# Altium PCB PCB3.PcbDoc
Units mil, origin at the board's own origin, x right, y up, seen from the top; angles counter-clockwise.
Board outline 6000 x 4000 mil, 2 copper layers (Top Layer, Bottom Layer); 71 components, 143 nets, 477 pads, 129 vias.
Unrouted connection lines stored in the file: 167.
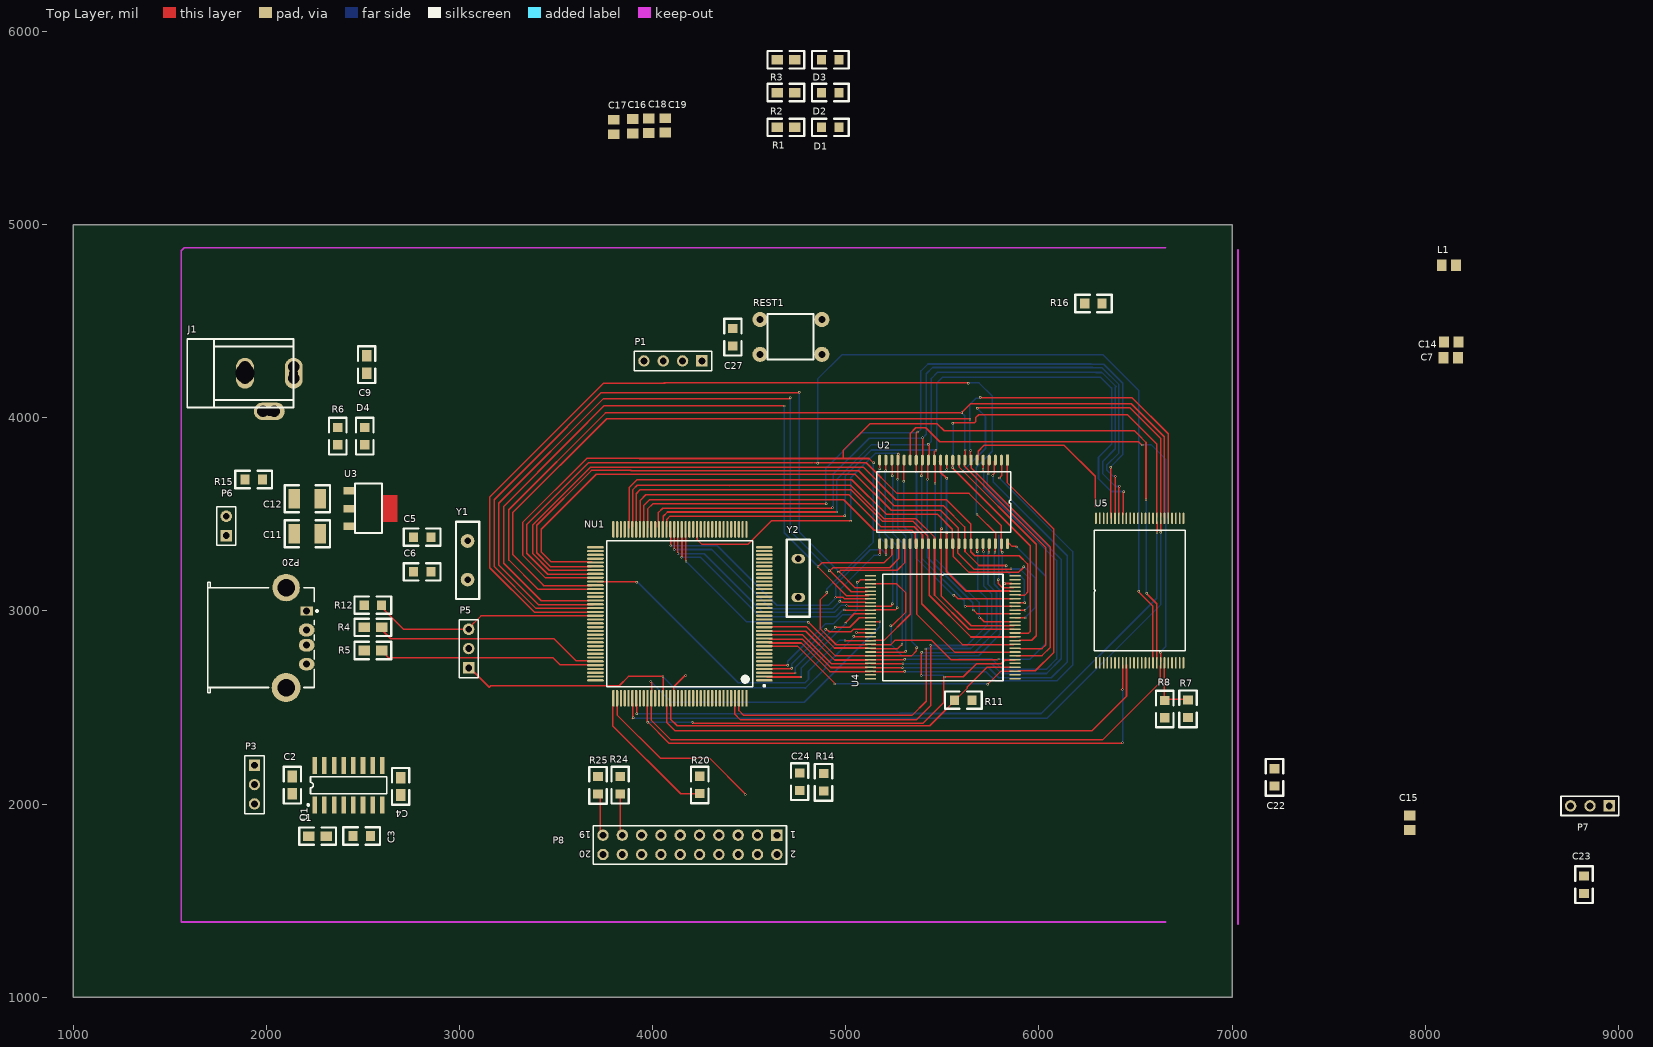
[diagram p0: Top Layer view]
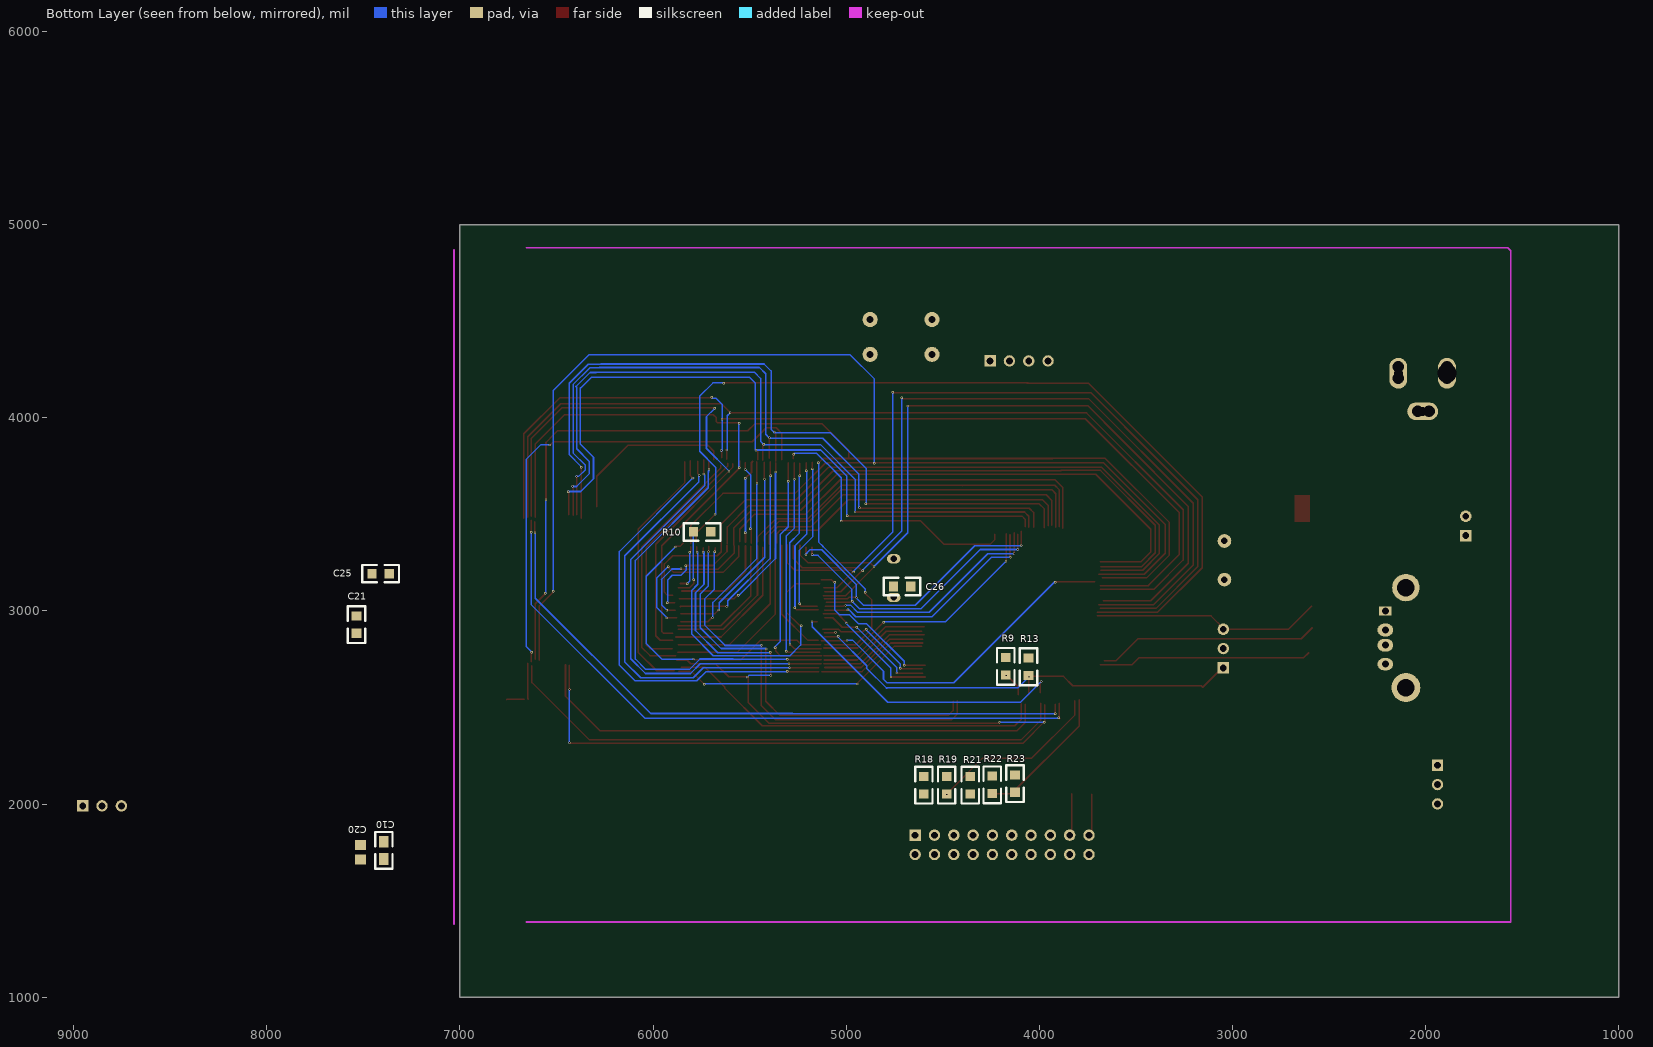
[diagram p1: Bottom Layer view, seen from below]

## Layer stack, top to bottom
Top Layer: signal copper 1.4
Dielectric: dielectric 12.6, FR-4, Dk 4.8
Bottom Layer: signal copper 1.4

## Board outline
1000,1000 7000,1000 7000,5000 1000,5000

## Design rules (kind name [scope] priority, off if disabled: settings)
Clearance [All] p1: gap=6
PolygonConnect [All] p1: connectstyle=Relief reliefconductorwidth=10 reliefentries=4 polygonreliefangle="90 Angle"
RoutingVias [All] p1: holewidth=28 width=50 viastyle="Through Hole" minholewidth=28 minwidth=50 maxholewidth=28 maxwidth=50
SilkscreenOverComponentPads [All] p1: minsilkscreentomaskgap=10
SolderMaskExpansion [All] p1: expansion=4
TestPointUsage [All] p1: valid=0 allowmultiple=FALSE
Testpoint [All] p1: side=15 testpointundercomponent=TRUE minsize=40 maxsize=100 preferedsize=60 minholesize=0 maxholesize=40 preferedholesize=32 testpointgrid=1 style=1023 order=0-112345678
Width [All] p1: maxlimit=50 minlimit=6 preferedwidth=10 minimp=50.000000 maximp=50.000000 favimp=50.000000
23 further rules are at their usual default settings.

## Classes and differential pairs
net class Y2_Nets: OSCIN OSCOUT
net class C26_Nets: GND OSCOUT
net class U1_Nets: GND NetC1_1 NetC1_2 NetC2_2 NetC3_1 NetC3_2 NetC4_1 NetU1_7 NetU1_8 NetU1_9 NetU1_10 PA9 PA10 R1IN T1OUT VDD5
net class C4_Nets: GND NetC4_1
net class C2_Nets: NetC2_2 VDD5
component class EXTERN: 1 C1 C2 C3 C4 D1 D2 D3 P1 P3 P20 R1 R2 R3 R4 R5 U1
component class GPIO_OUT: C5 C6 Y1
component class POWER: C7 C9 C10 C11 C12 C14 C15 C16 C17 C18 C19 C20 D4 J1 L1 NU1 R6 U3
component class STORAGE: C21 C22 C23 C24 P5 P6 R7 R8 R9 R10 R11 R12 R13 R14 R15 U2 U4 U5
component class "XLAT AND JTAG": C25 C26 C27 P7 P8 R16 R18 R19 R20 R21 R22 R23 R24 R25 REST1 Y2
net class C1_Nets: NetC1_1 NetC1_2
net class C3_Nets: NetC3_1 NetC3_2
net class C5_Nets: GND PB14
net class C6_Nets: GND PB15
net class C7_Nets: GND VDD33
net class C9_Nets: GND VDD5
net class C10_Nets: GND VDD33
net class C11_Nets: GND VDD5
net class C12_Nets: GND VDD33
net class C14_Nets: GND VDD33
net class C15_Nets: GND VDD33
net class C16_Nets: GND VDD33
net class C17_Nets: GND VDD33
net class C18_Nets: GND VDD33
net class C19_Nets: GND VDD33
net class C20_Nets: GND VDD33
net class C21_Nets: GND VDD33
net class C22_Nets: GND VDD33
net class C23_Nets: GND VDD33
net class C24_Nets: GND NetC24_1
net class C25_Nets: GND OSCIN
net class C27_Nets: GND NRST
net class D1_Nets: NetD1_2 VDD33
net class D2_Nets: NetD2_2 VDD33
net class D3_Nets: NetD3_2 VDD33
net class D4_Nets: GND NetD4_1
net class J1_Nets: GND VDD5
net class L1_Nets: NetL1_1 VDD33
net class NU1_Nets: A0 A1 A2 A3 A4 A5 A6 A7 A8 A9 A10 A11 A12 A13 A14 A15 A16 A17 A18 A19 A20 A21 A22 A23 BOOT0 D0 D1 D2 D3 D4 D5 D6 D7 D8 D9 D10 D11 D12 D13 D14 D15 GND LED0 LED1 LED2 NetL1_1 NetNU1_6 NetNU1_106 NRST OSCIN OSCOUT PA0 PA1 PA2 PA3 PA4 PA5 PA6 PA7 PA8 PA9 PA10 PA11 PA12 PA13 PA14 PA15 PB0 PB1 PB2 PB3 PB4 PB5 PB6 PB7 PB8 PB9 PB10 PB11 PB12 PB13 PB14 PB15 PC0 PC1 PC2 PC3 PC4 PC5 PC6 PC7 PC8 PC9 PC10 PC11 PC12 PC13 PC14 PC15 PD2 PD3 PD4 PD5 PD6 PD7 PE0 PE1 PF6 PF10 PF11 PG6 PG7 PG8 PG9 PG10 PG11 PG12 PG13 PG14 PG15 VDD33
net class P1_Nets: PA5 PA6 PA7 PA8
net class P3_Nets: GND R1IN T1OUT
net class P5_Nets: NetP5_2 PD6 PG6
net class P6_Nets: GND NetP6_2
net class P7_Nets: BOOT0 GND VDD33
net class P8_Nets: GND NetP8_11 NetP8_17 NetP8_19 NRST PA13 PA14 PA15 PB3 PB4 VDD33
net class P20_Nets: GND NetP20_2 NetP20_3 NetP20_5 NetP20_6 "USB 5V"
net class R1_Nets: LED0 NetD1_2
net class R2_Nets: LED1 NetD2_2
net class R3_Nets: LED2 NetD3_2
net class R4_Nets: NetP20_2 PA11
net class R5_Nets: NetP20_3 PA12
net class R6_Nets: NetD4_1 VDD33
net class R7_Nets: GND NetR7_1
net class R8_Nets: NetR7_1 VDD33
net class R9_Nets: PG10 VDD33
net class R10_Nets: NetR10_1 VDD33
net class R11_Nets: PG9 VDD33
net class R12_Nets: PG6 VDD33
net class R13_Nets: PD6 VDD33
net class R14_Nets: NetC24_1 VDD33
net class R15_Nets: NetP6_2 VDD33
net class R16_Nets: NRST VDD33
net class R18_Nets: PB4 VDD33
net class R20_Nets: PA14 VDD33
net class R21_Nets: PA13 VDD33
net class R22_Nets: GND PA14
net class R23_Nets: GND NetP8_11
net class R24_Nets: GND NetP8_17
net class R25_Nets: GND NetP8_19
net class REST1_Nets: GND NRST
net class U2_Nets: A0 A1 A2 A3 A4 A5 A6 A7 A8 A9 A10 A11 A12 A13 A14 A15 A16 A17 A18 D0 D1 D2 D3 D4 D5 D6 D7 D8 D9 D10 D11 D12 D13 D14 D15 GND PD4 PD5 PE0 PE1 PG10 VDD33
net class U3_Nets: GND VDD5 VDD33
net class A[0..23]: A0 A1 A2 A3 A4 A5 A6 A7 A8 A9 A10 A11 A12 A13 A14 A15 A16 A17 A18 A19 A20 A21 A22 A23 NetU4_1 NetU4_27 NetU4_28 NetU4_30 NetU4_55 NetU4_56
net class U5_Nets: A16 A17 D0 D1 D2 D3 D4 D5 D6 D7 GND NetP5_2 NetR7_1 PD4 PD5 PD7 VDD33
net class Y1_Nets: PB14 PB15
net class D[0..15]: AD0 AD1 AD2 AD3 AD4 AD5 AD6 AD7 AD8 AD9 AD10 AD11 AD12 AD13 AD14 AD15 AD16 AD17 AD18 AD19 AD20 AD21 AD22 AD23 D0 D1 D2 D3 D4 D5 D6 D7 D8 D9 D10 D11 D12 D13 D14 D15 DATA0 DATA1 DATA2 DATA3 DATA4 DATA5 DATA6 DATA7 DATA8 DATA9 DATA10 DATA11 DATA12 DATA13 DATA14 DATA15 NetU4_1 NetU4_27 NetU4_28 NetU4_30 NetU4_55 NetU4_56
net class U4_Nets: A0 A1 A2 A3 A4 A5 A6 A7 A8 A9 A10 A11 A12 A13 A14 A15 A16 A17 A18 A19 A20 A21 A22 D0 D1 D2 D3 D4 D5 D6 D7 D8 D9 D10 D11 D12 D13 D14 D15 GND NetC24_1 NetP6_2 NetR10_1 NetU4_1 NetU4_27 NetU4_28 NetU4_30 NetU4_55 NetU4_56 PD4 PD5 PD6 PG9 VDD33
net class R19_Nets: PA15 VDD33

## Components (designator, comment, footprint, x,y, rotation, side; value= is the part's Value field where it differs from the comment)
C1 "0.1uF" 0805#1 2221,1834 r0 top
C2 "0.1uF" 0805#1 2135,2143 r270 top
C3 "0.1uF" 0805#2 2539,1835 r180 top
C4 "0.1uF" 0805#1 2696,2047 r90 top
C5 "Cap" 0805#2 2762,3382 r0 top
C6 "Cap" 0805#2 2762,3202 r0 top
C7 "Cap" 6-0805 8132,4310 r180 top
C9 "102" 0805#1 2520,4320 r270 top
C10 "102" 0805#1 7393,1806 r270 bottom
C11 "2.2uf" 1210 2280,3400 r180 top
C12 "2.2uf" 1210 2280,3580 r180 top
C14 "Cap" 6-0805 8134,4392 r180 top
C15 "Cap" 6-0805 7920,1904 r90 top
C16 "Cap" 6-0805 3898,5509 r270 top
C17 "Cap" 6-0805 3798,5505 r270 top
C18 "Cap" 6-0805 3981,5511 r270 top
C19 "Cap" 6-0805 4065,5513 r270 top
C20 "Cap" 6-0805 7514,1751 r90 bottom
C21 "Cap" 0805#2 7535,2974 r270 bottom
C22 "Cap" 0805#2 7219,2183 r270 top
C23 "Cap" 0805#2 8821,1628 r270 top
C24 "Cap" 0805#2 4761,2161 r270 top
C25 "Cap" 0805#2 7455,3193 r180 bottom
C26 "Cap" 0805#2 4666,3126 r0 bottom
C27 "Cap" 0805#2 4415,4462 r270 top
D1 "LED0" 0805#2 4965,5503 r180 top
D2 "LED0" 0805#2 4965,5683 r180 top
D3 "LED0" 0805#2 4965,5853 r180 top
D4 "LED3" 0805#2 2510,3950 r270 top
J1 "PWR2.5" Power_In 1872,4320 r0 top
L1 "Inductor" 6-0805 8122,4790 r0 top
NU1 "STM32F103ZET6" LQFN144 4141,2985 r180 top
P1 "Header 4" HDR1X4 4255,4294 r180 top
P3 "Header 3" HDR1X3 1939,2201 r270 top
P5 "Header 3" HDR1X3 3048,2705 r90 top
P6 "Header 2" HDR1X2 1793,3390 r90 top
P7 "Header 3" HDR1X3 8952,1991 r180 top
P8 "Header 10X2" HDR2X10 4643,1839 r180 top
P20 "P10" 787616 1698,2862 r180 top
R1 "Res2" 0805#1 4645,5503 r0 top
R2 "Res2" 0805#1 4645,5683 r0 top
R3 "Res2" 0805#1 4645,5853 r0 top
R4 "Res2" 0805#1 2507,2915 r0 top
R5 "Res2" 0805#1 2507,2795 r0 top
R6 "Res2" 0805#2 2370,3950 r270 top
R7 "Res2" 0805#2 6771,2538 r270 top
R8 "Res2" 0805#2 6651,2447 r90 top
R9 "Res2" 0805#2 4174,2668 r90 bottom
R10 "Res2" 0805#2 5791,3409 r180 bottom
R11 "Res2" 0805#2 5563,2538 r0 top
R12 "Res2" 0805#2 2597,3030 r180 top
R13 "Res2" 0805#2 4056,2756 r270 bottom
R14 "Res2" 0805#2 4885,2068 r90 top
R15 "Res2" 0805#2 1980,3680 r180 top
R16 "Res2" 0805#2 6327,4591 r180 top
R18 "Res2" 0805#2 4598,2053 r90 bottom
R19 "Res2" 0805#2 4480,2053 r90 bottom
R20 "Res2" 0805#2 4244,2054 r90 top
R21 "Res2" 0805#2 4358,2053 r90 bottom
R22 "Res2" 0805#2 4244,2055 r90 bottom
R23 "Res2" 0805#2 4126,2061 r90 bottom
R24 "Res2" 0805#2 3832,2053 r90 top
R25 "Res2" 0805#2 3717,2052 r90 top
REST1 "SW_PB" SWPB 4876,4508 r0 top
U1 "MAX232-2" SOIC16 2426,2098 r0 top
U2 "IS61LV51216-10T" TSOP44 5837,3781 r270 top
U3 "LM1117-3.3" SOT-223 2600,3660 r270 top
U4 "M29W128GL" TSOP56 5128,3181 r0 top
U5 "NAND512W3A2CN6E" TSOP48 6295,2731 r90 top
Y1 "XTAL" XTAL-1#1 3042,3162 r90 top
Y2 "XTAL" XTAL-1#2 4754,3070 r90 top

## Footprints (in the part's own frame and the unit in brackets; to place one, negate y for a bottom-side part, rotate by r counter-clockwise, add the part's x,y. Pads: shape width x height; smd on the part's side, far side on the other; paste and mask are expansions set on the pad)
6-0805 [mm] "Chip Resistor; Body 2.0 x 1.3 mm (LxW typ)"
  rect 1.3x1.5 smd: 1(-0.95,0) 2(0.95,0)
0805#1 [mil]
  rect 60x50 smd: 1(0,0) 2(90,0)
  silkscreen extent -50,-45 140,45
0805#2 [mil]
  rect 47.37x50 smd: 1(0,0) 2(90,0)
  silkscreen extent -50,-45 140,45
1210 [mil]
  rect 60x100 smd: 1(0,0) 2(135,0)
  silkscreen extent -50,-70 185,70
787616 [mm] "Connector; USB1.1, Type A, Thru-Hole; 4 Position; Right Angle"
  rect 1.606x1.2 hole 0.92: 1(-12.99,-3.5)
  oval 2.057x1.676 hole 0.92: 2(-12.99,-1) 3(-12.99,1)
  oval 2.057x1.6 hole 0.92: 4(-12.99,3.5)
  round 3.8 hole 2.3: 5(-10.28,6.57)
  round 3.6 hole 2.3: 6(-10.28,-6.57)
  silkscreen extent -14.47,-7.25 0,7.25
HDR1X2 [mm] "Connector; Header; 2 Position"
  rect 1.5x1.5 hole 0.9: 1(0,0)
  round 1.5 hole 0.9: 2(2.54,0)
  silkscreen extent -1.27,-1.27 3.81,1.27
HDR1X3 [mm] "Connector; Header; 3 Position"
  rect 1.5x1.5 hole 0.9: 1(0,0)
  round 1.5 hole 0.9: 2(2.54,0) 3(5.08,0)
  silkscreen extent -1.27,-1.27 6.35,1.27
HDR1X4 [mm] "Connector; Header; 4 Position"
  rect 1.5x1.5 hole 0.9: 1(0,0)
  round 1.5 hole 0.9: 2(2.54,0) 3(5.08,0) 4(7.62,0)
  silkscreen extent -1.27,-1.27 8.89,1.27
HDR2X10 [mm] "Connector; Header; 10x2 Position"
  rect 1.5x1.5 hole 0.9: 1(0,0)
  round 1.5 hole 0.9: 2(0,2.54) 3(2.54,0) 4(2.54,2.54) 5(5.08,0) 6(5.08,2.54) 7(7.62,0) 8(7.62,2.54) 9(10.16,0) 10(10.16,2.54) 11(12.7,0) 12(12.7,2.54) 13(15.24,0) 14(15.24,2.54) 15(17.78,0) 16(17.78,2.54) 17(20.32,0) 18(20.32,2.54) 19(22.86,0) 20(22.86,2.54)
  silkscreen extent -1.27,-1.27 24.13,3.81
LQFN144 [mm] "TSQFP, 144-Leads, Body 23.8x23.8mm (max), Pitch 0.50mm, IPC Medium Density"
  oval 2.2x0.3 smd: 1(-11.1,8.75) 2(-11.1,8.25) 3(-11.1,7.75) 4(-11.1,7.25) 5(-11.1,6.75) 6(-11.1,6.25) 7(-11.1,5.75) 8(-11.1,5.25) 9(-11.1,4.75) 10(-11.1,4.25) 11(-11.1,3.75) 12(-11.1,3.25) 13(-11.1,2.75) 14(-11.1,2.25) 15(-11.1,1.75) 16(-11.1,1.25) 17(-11.1,0.75) 18(-11.1,0.25) 19(-11.1,-0.25) 20(-11.1,-0.75) 21(-11.1,-1.25) 22(-11.1,-1.75) 23(-11.1,-2.25) 24(-11.1,-2.75) 25(-11.1,-3.25) 26(-11.1,-3.75) 27(-11.1,-4.25) 28(-11.1,-4.75) 29(-11.1,-5.25) 30(-11.1,-5.75) 31(-11.1,-6.25) 32(-11.1,-6.75) 33(-11.1,-7.25) 34(-11.1,-7.75) 35(-11.1,-8.25) 36(-11.1,-8.75) 73(11.1,-8.75) 74(11.1,-8.25) 75(11.1,-7.75) 76(11.1,-7.25) 77(11.1,-6.75) 78(11.1,-6.25) 79(11.1,-5.75) 80(11.1,-5.25) 81(11.1,-4.75) 82(11.1,-4.25) 83(11.1,-3.75) 84(11.1,-3.25) 85(11.1,-2.75) 86(11.1,-2.25) 87(11.1,-1.75) 88(11.1,-1.25) 89(11.1,-0.75) 90(11.1,-0.25) 91(11.1,0.25) 92(11.1,0.75) 93(11.1,1.25) 94(11.1,1.75) 95(11.1,2.25) 96(11.1,2.75) 97(11.1,3.25) 98(11.1,3.75) 99(11.1,4.25) 100(11.1,4.75) 101(11.1,5.25) 102(11.1,5.75) 103(11.1,6.25) 104(11.1,6.75) 105(11.1,7.25) 106(11.1,7.75) 107(11.1,8.25) 108(11.1,8.75)
  oval 0.3x2.2 smd: 37(-8.75,-11.1) 38(-8.25,-11.1) 39(-7.75,-11.1) 40(-7.25,-11.1) 41(-6.75,-11.1) 42(-6.25,-11.1) 43(-5.75,-11.1) 44(-5.25,-11.1) 45(-4.75,-11.1) 46(-4.25,-11.1) 47(-3.75,-11.1) 48(-3.25,-11.1) 49(-2.75,-11.1) 50(-2.25,-11.1) 51(-1.75,-11.1) 52(-1.25,-11.1) 53(-0.75,-11.1) 54(-0.25,-11.1) 55(0.25,-11.1) 56(0.75,-11.1) 57(1.25,-11.1) 58(1.75,-11.1) 59(2.25,-11.1) 60(2.75,-11.1) 61(3.25,-11.1) 62(3.75,-11.1) 63(4.25,-11.1) 64(4.75,-11.1) 65(5.25,-11.1) 66(5.75,-11.1) 67(6.25,-11.1) 68(6.75,-11.1) 69(7.25,-11.1) 70(7.75,-11.1) 71(8.25,-11.1) 72(8.75,-11.1) 109(8.75,11.1) 110(8.25,11.1) 111(7.75,11.1) 112(7.25,11.1) 113(6.75,11.1) 114(6.25,11.1) 115(5.75,11.1) 116(5.25,11.1) 117(4.75,11.1) 118(4.25,11.1) 119(3.75,11.1) 120(3.25,11.1) 121(2.75,11.1) 122(2.25,11.1) 123(1.75,11.1) 124(1.25,11.1) 125(0.75,11.1) 126(0.25,11.1) 127(-0.25,11.1) 128(-0.75,11.1) 129(-1.25,11.1) 130(-1.75,11.1) 131(-2.25,11.1) 132(-2.75,11.1) 133(-3.25,11.1) 134(-3.75,11.1) 135(-4.25,11.1) 136(-4.75,11.1) 137(-5.25,11.1) 138(-5.75,11.1) 139(-6.25,11.1) 140(-6.75,11.1) 141(-7.25,11.1) 142(-7.75,11.1) 143(-8.25,11.1) 144(-8.75,11.1)
  silkscreen extent -11.23,-9.6 9.6,9.6, body extent -10,-10 10,10, height 1.6
Power_In [mil]
  rect 60x60 hole 60: 1(270,-116) 2(170,-287) 3(18,-57)
  oval 92x160 hole 47: 1(270,-90)
  rect 50x60 hole 60: 1(270,-57) 3(18,-116)
  rect 60x50 hole 60: 2(111,-287)
  oval 160x92 hole 47: 2(144,-287)
  oval 92x160 hole 100: 3(18,-90)
  silkscreen extent -281,-267 270,87
SOIC16 [mm]
  rect 0.6x2.2 smd: 1(-4.445,-2.6) 2(-3.175,-2.6) 3(-1.905,-2.6) 4(-0.635,-2.6) 5(0.635,-2.6) 6(1.905,-2.6) 7(3.175,-2.6) 8(4.445,-2.6) 9(4.445,2.6) 10(3.175,2.6) 11(1.905,2.6) 12(0.635,2.6) 13(-0.635,2.6) 14(-1.905,2.6) 15(-3.175,2.6) 16(-4.445,2.6)
  silkscreen extent -5.42,-2.72 5,1.1
SOT-223 [mm]
  rect 1x1.5 smd: 1(0.95,-4.31) 2(3.35,-4.31) 3(5.65,-4.31)
  Top Layer region: 1.524,0 5.08,0 5.08,2.032 1.524,2.032
  silkscreen extent 0,-3.56 6.5,0
SWPB [mm]
  round 2 hole 0.9: 1(-8.128,0) 2(-8.128,-4.572) 3(0,-4.572) 4(0,0)
  silkscreen extent -7.13,-5.25 -1.13,0.75
TSOP44 [mm]
  rect 1.4x0.4 smd: 1(0,0)
  oval 1.4x0.4 smd: 2(0,-0.8) 3(0,-1.6) 4(0,-2.4) 5(0,-3.2) 6(0,-4) 7(0,-4.8) 8(0,-5.6) 9(0,-6.4) 10(0,-7.2) 11(0,-8) 12(0,-8.8) 13(0,-9.6) 14(0,-10.4) 15(0,-11.2) 16(0,-12) 17(0,-12.8) 18(0,-13.6) 19(0,-14.4) 20(0,-15.2) 21(0,-16) 22(0,-16.8) 23(11,-16.8) 24(11,-16) 25(11,-15.2) 26(11,-14.4) 27(11,-13.6) 28(11,-12.8) 29(11,-12) 30(11,-11.2) 31(11,-10.4) 32(11,-9.6) 33(11,-8.8) 34(11,-8) 35(11,-7.2) 36(11,-6.4) 37(11,-5.6) 38(11,-4.8) 39(11,-4) 40(11,-3.2) 41(11,-2.4) 42(11,-1.6) 43(11,-0.8) 44(11,0)
  silkscreen extent 1.53,-17.2 9.47,0.4
TSOP48 [mm]
  rect 1.5x0.22 smd: 1(0,0)
  oval 1.5x0.22 smd: 2(0,-0.5) 3(0,-1) 4(0,-1.5) 5(0,-2) 6(0,-2.5) 7(0,-3) 8(0,-3.5) 9(0,-4) 10(0,-4.5) 11(0,-5) 12(0,-5.5) 13(0,-6) 14(0,-6.5) 15(0,-7) 16(0,-7.5) 17(0,-8) 18(0,-8.5) 19(0,-9) 20(0,-9.5) 21(0,-10) 22(0,-10.5) 23(0,-11) 24(0,-11.5) 25(19,-11.5) 26(19,-11) 27(19,-10.5) 28(19,-10) 29(19,-9.5) 30(19,-9) 31(19,-8.5) 32(19,-8) 33(19,-7.5) 34(19,-7) 35(19,-6.5) 36(19,-6) 37(19,-5.5) 38(19,-5) 39(19,-4.5) 40(19,-4) 41(19,-3.5) 42(19,-3) 43(19,-2.5) 44(19,-2) 45(19,-1.5) 46(19,-1) 47(19,-0.5) 48(19,0)
  silkscreen extent 1.58,-11.75 17.42,0.25
TSOP56 [mm]
  rect 1.5x0.2 smd: 1(0,0)
  oval 1.5x0.2 smd: 2(0,-0.5) 3(0,-1) 4(0,-1.5) 5(0,-2) 6(0,-2.5) 7(0,-3) 8(0,-3.5) 9(0,-4) 10(0,-4.5) 11(0,-5) 12(0,-5.5) 13(0,-6) 14(0,-6.5) 15(0,-7) 16(0,-7.5) 17(0,-8) 18(0,-8.5) 19(0,-9) 20(0,-9.5) 21(0,-10) 22(0,-10.5) 23(0,-11) 24(0,-11.5) 25(0,-12) 26(0,-12.5) 27(0,-13) 28(0,-13.5) 29(19,-13.5) 30(19,-13) 31(19,-12.5) 32(19,-12) 33(19,-11.5) 34(19,-11) 35(19,-10.5) 36(19,-10) 37(19,-9.5) 38(19,-9) 39(19,-8.5) 40(19,-8) 41(19,-7.5) 42(19,-7) 43(19,-6.5) 44(19,-6) 45(19,-5.5) 46(19,-5) 47(19,-4.5) 48(19,-4) 49(19,-3.5) 50(19,-3) 51(19,-2.5) 52(19,-2) 53(19,-1.5) 54(19,-1) 55(19,-0.5) 56(19,0)
  silkscreen extent 1.58,-13.75 17.42,0.25
XTAL-1#1 [mm]
  round 1.8 hole 0.85: 1(0,0) 2(5.08,0)
  silkscreen extent -2.54,-1.52 7.62,1.52
XTAL-1#2 [mm]
  oval 1.203x1.8 hole 0.85: 1(0,0) 2(5.08,0)
  silkscreen extent -2.54,-1.52 7.62,1.52

## Part data
C1 C2 C3 C4 C9 C10 C11 C12: library part CAP, "Capacitor"
C5 C6 C7 C14 C15 C16 C17 C18 C19 C20 C21 C22 C23 C24 C25 C26 C27: "Capacitor"
D1 D2 D3: "Typical INFRARED GaAs LED"
D4: "Typical BLUE SiC LED"
J1: "Low Voltage Power Supply Connector"
P1: "Header, 4-Pin"
P3 P5 P7: "Header, 3-Pin"
P6: "Header, 2-Pin"
P8: "Header, 10-Pin, Dual row"
P20: library part COMPONENT_1
R1 R2 R3 R4 R5 R6 R7 R8 R9 R10 R11 R12 R13 R14 R15 R16 R18 R19 R20 R21 R22 R23 R24 R25: "Resistor"
U1: library part MAX3232-2
Y1 Y2: "Crystal Oscillator"

## Via types
v1: diameter 12, hole 7, Top Layer to Bottom Layer, 129 vias

## Nets (pads, with @x,y where several pads share a name; then routed paths per layer and width w, separated by ;. In a path a pad name is that pad's centre, name@x,y a point inside that pad or via, vN(x,y) a via of type N, cw(c..) or ccw(c..) an arc to the next point about the centre after c; other vN are vias at no path point)
A0: NU1.10 U2.1 U4.31 | length 2678.3
  Top Layer w8: NU1.10@4608,2818 4750,2818 v1@4946,2622 ; v1@5736,2622 5801,2687 U4.31@5866,2687 ; U2.1@5835,3771 5835,3665 6076,3424 6076,2785 5981,2690 U4.31@5890,2690
  Bottom Layer w8: v1(4942,2622) v1@5733,2622
  other v1: 5735,2621
A1: NU1.11 U2.2 U4.26 | length 2900.8
  Top Layer w8: NU1.11@4603,2834 4770,2834 4918,2686 U4.26@5126,2686 ; U4.26@5141,2686 5304,2686 v1@5306,2688 ; v1(5794,3688) 5808,3702 U2.2@5808,3776
  Bottom Layer w8: v1@5305,2685 5726,2685 5773,2638 6093,2638 6174,2719 6174,3308 v1@5792,3690 ; v1@5789,3688 v1@5793,3684
  other v1: 5305.22,2687.22
A2: NU1.12 U2.3 U4.25 | length 2826.8
  Top Layer w8: NU1.12@4605,2854 4775,2854 4922,2707 U4.25@5110,2707 ; U4.25@5143,2706 v1@5295,2706 ; v1@5761,3703 5769,3711 U2.3@5769,3775
  Bottom Layer w8: v1@5295,2706 5740,2706 5792,2654 6064,2654 6146,2736 6146,3285 5763.31,3667.69 v1@5763.31,3700.31 ; v1@5761,3698 v1@5764,3701
  other v1: 5293,2705 5761,3701
A3: NU1.13 U2.4 U4.24 | length 2808.2
  Top Layer w8: NU1.13@4597,2877 4776,2877 4926,2727 U4.24@5117,2727 ; U4.24@5130,2726 v1@5297,2726 ; v1@5738,3711 U2.4@5738,3783
  Bottom Layer w8: v1@5297,2726 5756,2726 5806,2676 6039,2676 6115,2752 6115,3266 5733,3648 v1@5733,3705 ; 5734,3702 v1@5738,3706
  other v1: 5296,2727 5737,3709
A4: NU1.14 U2.5 U4.23 | length 2765.4
  Top Layer w8: NU1.14@4610,2895 4793,2895 4942,2746 U4.23@5114,2746 ; U4.23 v1@5300.93,2747.93 ; 5711,3722 U2.5@5711,3772
  Bottom Layer w8: v1(5305,2750) 5583,2750 ; 5584,2751 5757,2751 5811,2697 6037,2697 6091,2751 6091,3261 5714,3638 5714,3723 5712,3725 ; 5712,3717 v1@5712,3733
  other v1: 5710,3734
A5: NU1.15 U2.18 U4.22 | length 1837.6
  Top Layer w8: NU1.15@4597,2919 4795,2919 4947,2767 U4.22@5117,2767 ; U4.22@5126,2768 5340,2768 5341,2769 ; v1@5299,3673 U2.18@5299,3767 ; 5340,2767 5365,2792 v1@5365,2812
  Bottom Layer w8: v1(5300,3671) 5300,3436 5342,3394 ; 5342,3393 5342,2840 v1@5372,2810
  other v1: 5368,2810
A6: NU1.50 U2.19 U4.21 | length 2610.3
  Top Layer w8: NU1.50@4230,3398 4230,3369 4255,3344 4493,3344 4616,3467 v1@5027,3467 ; U4.21@5138,2787 5305,2787 v1(5310,2792) ; v1@5269,3681 U2.19@5269,3768 ; v1@5271,3816 5273,3814 U2.19@5273,3788
  Bottom Layer w8: v1(5025,3465) 5025,3689 5101,3765 ; 5101,3763 5153,3815 5268,3815 v1@5271,3812 ; v1(5268,3682) 5268,3429 5311,3386 ; v1(5310,2792) 5310,3387
  other v1: 5271,3811
A7: NU1.53 U2.20 U4.20 | length 2399
  Top Layer w8: v1@4172,3258 NU1.53@4172,3400 ; v1@4806,2943 4941,2808 U4.20@5117,2808 ; U4.20@5130,2805 5269,2805 v1(5291,2827) ; v1(5241,3700) U2.20@5241,3764
  Bottom Layer w8: v1(4173,3257) 4487,2943 v1@4808,2943 ; v1@5244,3696 5244,3401 5292,3353 v1@5292,2825
  other v1: 4806,2941
A8: NU1.54 U2.21 U4.10 | length 2124.1
  Top Layer w8: v1@4149,3277 4152,3280 NU1.54@4152,3395 ; v1@4995,3004 5111,3004 U4.10@5112,3003 ; U4.10@5145,3005 5257,3005 v1@5267,3015 ; v1@5206,3722 U2.21@5206,3766
  Bottom Layer w8: v1(4149.96,3277.96) 4248.04,3277.96 4556,2970 4950,2970 4991,3011 ; v1@5203,3724 5203,3399 5265,3337 v1@5265,3018
  other v1: 4992,3005 5266,3017 5206,3726
A9: NU1.55 U2.22 U4.9 | length 2072.9
  Top Layer w8: NU1.55@4131,3405 v1(4131,3297) v1@4132,3296 ; v1@5009,3028 5014,3023 U4.9@5108,3023 ; U4.9@5150,3023 5233,3023 v1@5244,3034 ; v1@5175,3737 U2.22@5175,3769
  Bottom Layer w8: v1@4132,3296 4267,3296 4570,2993 4941,2993 4978,3030 v1@4999,3030 ; v1@5172,3733 5172,3385 5242,3315 v1@5242,3038
  other v1: 5004,3028 5241,3037 5176,3735
A10: NU1.56 U2.23 U4.8 | length 1582.4
  Top Layer w8: v1@4112,3319 NU1.56@4112,3397 ; 4975,3049 4980,3044 U4.8@5103,3044 ; v1@5177,3297 U2.23@5177,3330
  Bottom Layer w8: v1@4109,3318 4306,3318 4613,3011 4931,3011 4965,3045 v1@4965,3051 ; v1@4972,3054 4972,3113 5146,3287 5179,3287
  other v1: 4969,3050 5175,3292 4112,3318
A11: NU1.57 U2.24 U4.7 | length 1694.7
  Top Layer w8: NU1.57@4093,3411 4093,3340 v1(4094,3339) ; v1@4946,3071 4985,3071 4992,3064 U4.7@5113,3064 ; v1@5207,3288 5208,3289 U2.24@5208,3330
  Bottom Layer w8: v1@4091,3337 4334,3337 4642,3029 4910,3029 v1@4947,3066 ; v1@4949,3074 4949,3138 5127,3316 5187,3316 v1@5212,3291
  other v1: 4947,3069 5208,3291
A12: NU1.87 U2.25 U4.6 | length 4168.2
  Top Layer w8: 3581,3894 3749,4062 4680,4062 v1(4681,4061) ; 3582,3894 3229,3541 3229,3247 3424,3052 NU1.87@3670,3052 ; v1(4856,3228) 4878,3250 5199,3250 5239,3290 U2.25@5239,3341 ; v1@4858,3225 5004,3079 U4.6@5119,3079
  Bottom Layer w8: v1(4681,4061) 4681,3405 v1@4855,3231
A13: NU1.88 U2.26 U4.5 | length 4295.2
  Top Layer w8: NU1.88@3692,3033 3408,3033 3204,3237 3204,3557 3746,4099 v1@4713,4099 ; v1@4916,3206 4934,3224 5227,3224 5274,3271 U2.26@5274,3340 ; v1@4920,3207 5028,3099 U4.5@5112,3099
  Bottom Layer w8: v1(4713,4103) 4713,3413 v1@4917,3209
  other v1: 4915,3208
A14: NU1.89 U2.27 U4.4 | length 4399.5
  Top Layer w8: 3557,3953 3733,4129 v1@4761,4129 ; 3558,3953 3180,3575 3180,3230 3397,3013 NU1.89@3684,3013 ; v1@4965,3201 4974,3210 5266,3210 5306,3250 U2.27@5306,3343 ; 4967,3201 5048,3120 U4.4@5115,3120
  Bottom Layer w8: v1@4758,4132 4758,3410 v1@4964,3204
  other v1: 4961,3201 4759,4132
A15: NU1.90 U2.42 U4.3 | length 6317.7
  Top Layer w8: NU1.90@3701,2993 3388,2993 3157,3224 3157,3589 3746,4178 4065,4178 ; 4057,4180 v1@5632,4180 ; U4.3@5137,3141 5263,3141 5311,3093 5311,2995 5239,2923 v1@5231,2923 ; v1@5682,3497 5777,3402 U2.42@5777,3356 ; v1@5774,3304 U2.42@5774,3331
  Bottom Layer w8: v1@5236,2924 5236,2823 5292,2767 5379,2767 ; 5375,2768 5688,2768 5800,2880 5800,3106 5768,3138 v1@5768,3305 ; v1@5633,4180 5690,4180 5758,4112 5758,3826 5676,3744 v1@5676,3499
  other v1: 5232,2923 5772,3304 5679,3500 5634,4178
A16: NU1.80 U2.43 U4.54 U5.16 | length 7236.8
  Top Layer w8: NU1.80@3693,3190 3457,3190 3348,3299 3348,3447 3669,3768 4830,3768 ; 4834,3767 5106,3767 5265,3608 5638,3608 5805.5,3440.5 U2.43 ; 5805,3308 U2.43@5805,3333 ; v1@5824,3142 U4.54@5858,3142 ; v1@6513,3102 6589,3026 U5.16@6589,2745
  Bottom Layer w8: v1@4853,3765 4854,3766 4854,4200 4981,4327 6330,4327 6516,4141 v1@6516,3100 ; v1@5810,3304 5810,3155 v1@5824,3141
  other v1: 6517,3101 5822,3141 5810,3303 4855,3765
A17: NU1.81 U2.44 U4.19 U5.17 | length 8231.1
  Top Layer w8: NU1.81@3674,3171 3446,3171 3327,3290 3327,3457 3660,3790 3932,3790 ; 3931,3789 5120,3789 v1@5143,3766 ; v1@4904,3093 4867,3056 4867,2909 4951,2825 U4.19@5111,2825 ; 4986,3792 4986,3830 5125,3969 5472,3969 5509,3932 6495,3932 6512,3915 ; U4.19@5131,2824 5231,2824 5255,2848 5443,2848 5543,2748 5787,2748 v1@5788,2749 ; U2.44@5843,3351 5860,3334 v1@5886,3334 ; 6512,3914 6554,3872 v1@6554,3573 ; v1@6558,3089 6610,3037 U5.17@6610,2751
  Bottom Layer w8: v1@4901,3097 4901,3114 5120,3333 ; 5118,3332 5143,3357 v1@5143,3769 ; v1@5786,2750 5954,2750 6035,2831 6035,3180 v1@5883,3332 ; v1@6555,3089 v1@6555,3573
  other v1: 5790,2751 6557,3092 4902,3096 5885,3331 6554,3576 5144,3767
A18: NU1.82 U2.28 U4.18 | length 2341.5
  Top Layer w8: NU1.82@3714,3151 v1@3917,3151 ; v1@4998.65,2846.36 U4.18 ; U4.18@5146,2847 5198,2847 5334,2983 U2.28@5334,3339
  Bottom Layer w8: v1@3920,3151 4443,2628 4789,2628 4807,2646 4807,2688 4968,2849 v1@4996,2849
  other v1: 4996,2847 3918,3149
A19: NU1.2 U4.11 | length 688.3
  Top Layer w8: NU1.2@4592,2658 v1(4768,2658) ; v1@4998,2939 5044,2985 U4.11@5119,2985
  Bottom Layer w8: 4769,2664 4769,2704 4999,2934 v1@4999,2941
  other v1: 4998,2937
A20: NU1.3 U4.12 | length 641.8
  Top Layer w8: NU1.3@4603,2678 4737,2678 v1@4738,2679 ; v1@4947,2916 5021,2916 5069,2964 U4.12@5112,2964
  Bottom Layer w8: v1@4738,2679 4738,2707 4942,2911 v1@4942,2916
  other v1: 4740,2679 4945,2916
A21: NU1.4 U4.15 | length 613.1
  Top Layer w8: NU1.4@4607,2700 4718,2700 v1@4719,2701 ; v1@4899,2907 4914,2892 5027,2892 5040,2905 U4.15@5121,2905
  Bottom Layer w8: v1(4720,2704) 4720,2725 4894,2899
  other v1: 4897,2905
A22: NU1.5 U4.2 | length 812.4
  Top Layer w8: NU1.5@4591,2718 4698,2718 v1(4699.29,2719.29) v1@4700,2720 ; v1@5062,3147 5076.31,3161.32 U4.2
  Bottom Layer w8: v1@4700,2723 4700,2739 4895,2934 4936,2934 4981,2979 5033,2979 5060,3006 v1(5060,3149) v1@5060,3150
A23: NU1.1
BOOT0: NU1.138 P7.2
D0: NU1.83 U2.7 U4.35 U5.29 | length 6405.1
  Top Layer w8: 3275,3508 3762,3995 5639,3995 v1@5642,3992 ; 3275,3509 3275,3293 3436,3132 ; 3435,3131 NU1.83@3685,3131 ; U2.7@5643,3793 5643,3825 v1@5645,3827 ; U2.7@5650,3754 5650,3738 6059,3329 6059,2812 6016,2769 U4.35@5882,2769 ; v1@5693,4104 6482,4104 6669.02,3916.99 U5.29
  Bottom Layer w8: v1@5646,3827 5642,3831 5642,4069 5674,4101 v1@5694,4101
  other v1: 5646,3830 5643,3992 5696,4106
D1: NU1.84 U2.8 U4.37 U5.30 | length 6373.9
  Top Layer w8: 3255,3264 3255,3524 3756,4025 v1(5601,4025) v1@5603,4023 ; 3256,3263 3407,3112 ; 3407,3111 3407,3112 ; NU1.84@3685,3112 3407,3112 ; v1@5599,4026 5645,4072 6478,4072 6648,3902 U5.30@6648,3485 ; U2.8@5613,3765 5613,3750 6036,3327 6036,2825 6016,2805 U4.37@5900,2805 ; U2.8@5618,3785 v1@5618,3832
  Bottom Layer w8: v1@5599,4027 5616,4010 v1@5616,3831
  other v1: 5620,3833
D2: NU1.114 U2.9 U4.39 U5.31 | length 6445.3
  Top Layer w8: 3894,2443 3896,2445 NU1.114@3896,2523 ; U2.9@5588,3761 5588,3743 5986,3345 ; v1@5678,4052 6471,4052 6630,3893 U5.31@6630,3491 ; U4.39@5899,2848 5963,2848 5986,2871 5986,3342 5985,3343 ; v1@6630,3411 U5.31@6630,3468
  Bottom Layer w8: v1@3899,2444 6042,2444 6631,3033 v1@6631,3409 ; v1@5606,3724 5724,3842 5724,3845 ; v1@5682,4047 5723,4006 5723,3848
  other v1: 3899,2447 6631,3407 5607,3723 5681,4049
D3: NU1.115 U2.10 U4.41 U5.32 | length 6263.8
  Top Layer w8: v1@3918,2464 NU1.115@3918,2518 ; U2.10@5551,3777 5551,3741 5955,3337 5955,2894 5946,2885 U4.41@5897,2885 ; v1@5553,3974 5666,3974 5672,3980 5672,4000 5688,4016 6458,4016 6610,3864 U5.32@6610,3485 ; v1@6611,3407 U5.32@6611,3461
  Bottom Layer w8: v1(3918,2467) 5287,2467 ; 5278,2469 6012,2469 6609,3066 v1@6609,3403 ; v1@5555,3973 5555,3743 v1@5556,3742
  other v1: 6611,3404 5554,3741 5554,3972
D4: NU1.58 U2.13 U4.44 U5.41 | length 4895.8
  Top Layer w8: NU1.58@4074,3436 4074,3475 4090,3491 4992,3491 v1@4993,3492 ; U2.13@5458,3783 5458,3825 5464,3831 v1@5468,3831 ; v1@5463,3659 U2.13@5463,3772 ; v1@5696,2965 5717,2944 U4.44@5857,2944 ; U5.41@6436,3497 v1@6436,3618
  Bottom Layer w8: v1@4997,3491 4997,3698 5132,3833 v1@5469,3833 ; v1@5462,3657 5462,3271 5690,3043 ; v1@5470,3833 5470,4179 5500,4209 6319,4209 6377,4151 ; 5691,3044 5691,2968 v1@5694,2965 ; 6376,4155 6376,3864 6308,3796 6308,3684 6374,3618 v1@6441,3618
  other v1: 5692,2965 4994,3493 6438,3617 5462,3660 5467,3832
D5: NU1.59 U2.14 U4.46 U5.42 | length 4929.3
  Top Layer w8: NU1.59@4055,3432 4055,3490 4077,3512 4953,3512 v1@4954,3513 ; v1@5424,3679 U2.14@5424,3770 ; v1@5430,3864 5431,3863 U2.14@5431,3779 ; v1@5661,3004 5679,2986 U4.46@5857,2986 ; U5.42@6414,3496 v1@6414,3646
  Bottom Layer w8: v1@4954,3513 4954,3682 5133,3861 v1@5428,3861 ; v1@5421,3677 5421,3278 5657,3042 ; v1@5430,3865 5443,3878 5443,4203 5475,4235 6298,4235 ; 5656,3040 5656,3008 v1@5661,3003 ; 6293,4234 6326,4234 6399,4161 ; 6399,4163 6395,4159 6395,3839 6331,3775 6331,3709 6396,3644 v1@6418,3644
  other v1: 5659.18,3004.82 4954,3512 6417,3645 5423,3681 5427,3863
D6: NU1.60 U2.15 U4.48 U5.43 | length 5002.1
  Top Layer w8: NU1.60@4030,3433 4030,3510 4052,3532 4925,3532 v1@4930,3537 ; v1@5394,3696 U2.15@5394,3773 ; U2.15@5399,3790 v1@5399,3893 ; v1@5619,3024 5857,3024 U4.48@5859,3022 ; v1@6392,3699 6395,3696 U5.43@6395,3497
  Bottom Layer w8: v1@4934,3535 4934,3707 5121,3894 v1@5396,3894 ; v1@5394,3696 5394,3271 5613,3052 ; v1@5401,3898 5417,3914 5417,4228 5449,4260 6279,4260 ; v1@5614,3023 5614,3052 ; 6276,4258 6328,4258 6414,4172 ; v1@6399,3696 6385,3696 6351,3730 6351,3755 6414,3818 6414,4171
  other v1: 5619,3023 4931,3534 6396,3696 5391,3699 5397,3897
D7: NU1.63 U2.16 U4.50 U5.44 | length 5154.3
  Top Layer w8: NU1.63@3974,3430 3974,3527 4002,3555 v1(4899,3555) ; v1(5365,3719) U2.16@5365,3768 ; U2.16@5365,3775 5365,3921 v1@5373,3929 ; v1@5561,3083 5580,3064 U4.50@5865,3064 ; U5.44@6372,3480 v1(6372,3744)
  Bottom Layer w8: v1@4896,3555 4896,3737 5081,3922 v1@5374,3922 ; v1@5366,3716 5366,3271 v1@5558,3079 ; v1@5374,3925 5389,3940 5389,4242 5425,4278 6271,4278 ; 6266,4277 6335,4277 6434,4178 ; v1@6373,3748 6434,3809 6434,4179
  other v1: 5558,3081 5371,3926
D8: NU1.64 U2.29 U4.36 | length 2574.7
  Top Layer w8: NU1.64@3954,3441 3954,3546 3984,3576 ; 3982,3575 4989,3575 5147,3417 5342,3417 5359,3400 U2.29@5359,3350 ; U2.29@5368,3325 5368,2982 5563,2787 U4.36@5872,2787
D9: NU1.65 U2.30 U4.38 | length 2599.6
  Top Layer w8: NU1.65@3936,3444 3936,3572 3965,3601 5017,3601 5182,3436 5354,3436 5397,3393 U2.30@5397,3345 ; U2.30@5393,3337 5393,3037 5604,2826 U4.38@5870,2826
D10: NU1.66 U2.31 U4.40 | length 2607.2
  Top Layer w8: NU1.66@3915,3433 3915,3607 3935,3627 5027,3627 5191,3463 5349,3463 5425,3387 U2.31@5425,3360 ; U2.31@5432,3329 5432,3081 5648,2865 U4.40@5883,2865
D11: NU1.67 U2.32 U4.42 | length 2639.1
  Top Layer w8: NU1.67@3898,3437 3898,3628 3921,3651 5024,3651 5198,3477 5364,3477 5459,3382 U2.32@5459,3357 ; 4398,3651 4400,3649 ; U2.32@5459,3336 5459,3082 5636,2905 U4.42@5870,2905
D12: NU1.68 U2.35 U4.45 | length 2897.1
  Top Layer w8: NU1.68@3878,3428 3878,3638 3919,3679 5031,3679 5210,3500 5474,3500 5551,3423 U2.35@5551,3357 ; U2.35@5557,3337 5557,3280 5638,3199 ; 5637,3200 5894,3200 v1@5918,3224 ; U4.45@5878,2964 5926,2964 v1@5929,2967
  Bottom Layer w8: v1@5923,3228 5981,3170 5981,3018 v1@5927,2964
  other v1: 5929,2963 5921,3229
D13: NU1.77 U2.36 U4.47 | length 3571.3
  Top Layer w8: NU1.77@3686,3254 3474,3254 3423,3305 3423,3423 3708,3708 5048,3708 5235,3521 5490,3521 5582,3429 U2.36@5582,3339 ; U2.36@5580,3338 5580,3300 5665,3215 v1@5853,3215 ; U4.47@5886,3004 v1(5928,3004) v1@5930,3002
  Bottom Layer w8: v1@5854,3217 5902,3217 5956,3163 ; v1@5928,3003 5955,3030 5955,3163
  other v1: 5855,3218
D14: NU1.78 U2.37 U4.49 | length 3572.9
  Top Layer w8: NU1.78@3683,3229 3472,3229 3400,3301 3400,3444 3683,3727 3889,3727 ; 3888,3726 5067,3726 5249,3544 5506,3544 5615,3435 U2.37@5615,3348 ; U2.37@5617,3339 5617,3307 5689,3235 v1@5831,3235 ; U4.49@5888,3042 5928,3042 v1@5930,3040
  Bottom Layer w8: v1@5829,3234 5829,3210 5855,3184 5900,3184 5924,3160 ; v1@5923,3044 5923,3162
  other v1: 5927,3042 5830,3234
D15: NU1.79 U2.38 U4.51 | length 3661.1
  Top Layer w8: NU1.79@3683,3211 3465,3211 3379,3297 3379,3445 3678,3744 5091,3744 5259,3576 5521,3576 5647,3450 5647,3306 5667,3286 5898,3286 5941,3243 5941,3096 5927,3082 U4.51@5898,3082
GND: C4.2 C5.1 C6.1 C7.1 C9.2 C10.2 C11.2 C12.2 C14.1 C15.1 C16.1 C17.1 C18.1 C19.1 C20.1 C21.2 C22.2 C23.2 C24.2 C25.1 C26.1 C27.1 D4.2 J1.2 J1.3 NU1.16 NU1.30 NU1.31 NU1.38 NU1.51 NU1.61 NU1.71 NU1.94 NU1.107 NU1.120 NU1.130 NU1.143 P3.2 P6.1 P7.3 P8.4 P8.6 P8.8 P8.10 P8.12 P8.14 P8.16 P8.18 P8.20 P20.4 R7.2 R22.2 R23.2 R24.2 R25.2 REST1.1 U1.15 U2.12 U2.34 U3.1 U4.33 U4.52 U5.13 U5.36 | length 943.6
  Top Layer w10: U2.12@5484,3774 5490,3768 5490,3719 v1@5524,3685 ; U2.34@5522,3335 5522,3203 5623,3102 U4.52@5851,3102 ; U2.34@5522,3356 5522,3403 v1@5524,3405
  Bottom Layer w10: v1@5521,3688 5522,3687 v1@5522,3403
  other v1: 5522,3405 5523,3686
LED0: NU1.19 R1.1
LED1: NU1.20 R2.1
LED2: NU1.21 R3.1
NetC1_1: C1.1 U1.1
NetC1_2: C1.2 U1.3
NetC2_2: C2.2 U1.2
NetC3_1: C3.1 U1.5
NetC3_2: C3.2 U1.4
NetC4_1: C4.1 U1.6
NetC24_1: C24.1 R14.2 U4.14
NetD1_2: D1.2 R1.2
NetD2_2: D2.2 R2.2
NetD3_2: D3.2 R3.2
NetD4_1: D4.1 R6.1
NetL1_1: L1.1 NU1.32 NU1.33
NetP5_2: P5.2 U5.7
NetP6_2: P6.2 R15.2 U4.16 | length 62.4
  Top Layer w8: v1@5051,2888 5052,2887 U4.16@5113,2887
  other v1: 5055,2889
NetP8_11: P8.11 R23.1
NetP8_17: P8.17 R24.1 | length 218.6
  Top Layer w8: R24.1 3832,1850 P8.17
NetP8_19: P8.19 R25.1 | length 220.9
  Top Layer w8: R25.1@3729,2050 3729,1856 P8.19@3748,1837
NetP20_2: P20.2 R4.1
NetP20_3: P20.3 R5.1
NetR7_1: R7.1 R8.2 U5.19 | length 279.1
  Top Layer w8: R8.2@6646,2543 6649,2546 U5.19@6649,2728 ; R8.2@6666,2543 6756,2543 R7.1@6758,2541
NetR10_1: R10.1 U4.53 | length 342.5
  Top Layer w8: v1@5789,3164 5789,3142 5812,3119 U4.53@5869,3119
  Bottom Layer w8: v1@5791,3161 R10.1@5791,3392
  other v1: 5789,3162
NRST: C27.2 NU1.25 P8.15 R16.1 REST1.2
OSCIN: C25.2 NU1.23 Y2.2
OSCOUT: C26.2 NU1.24 Y2.1
PA0: NU1.34
PA1: NU1.35
PA2: NU1.36
PA3: NU1.37
PA4: NU1.40
PA5: NU1.41 P1.1
PA6: NU1.42 P1.2
PA7: NU1.43 P1.3
PA8: NU1.100 P1.4
PA9: NU1.101 U1.11
PA10: NU1.102 U1.12
PA11: NU1.103 R4.2 | length 1147
  Top Layer w8: R4.2@2587,2913 2644,2856 3489,2856 3602,2743 NU1.103@3663.6,2743
PA12: NU1.104 R5.2 | length 1106.1
  Top Layer w8: R5.2@2606,2784 2633,2757 3485,2757 3521,2721 NU1.104@3686,2721
PA13: NU1.105 P8.7 R21.1
PA14: NU1.109 P8.9 R20.1 R22.1 | length 749.4
  Top Layer w8: NU1.109@3794,2539 3794,2404 4145,2053 R20.1@4263,2053
PA15: NU1.110 P8.5 R19.1 | length 909
  Top Layer w8: NU1.110@3818,2536 3818,2459 4039,2238 4294,2238 v1@4481,2051
  other v1: 4480,2050
PB0: NU1.46
PB1: NU1.47
PB2: NU1.48
PB3: NU1.133 P8.13
PB4: NU1.134 P8.3 R18.1
PB5: NU1.135
PB6: NU1.136
PB7: NU1.137
PB8: NU1.139
PB9: NU1.140
PB10: NU1.69
PB11: NU1.70
PB12: NU1.73
PB13: NU1.74
PB14: C5.2 NU1.75 Y1.2
PB15: C6.2 NU1.76 Y1.1
PC0: NU1.26
PC1: NU1.27
PC2: NU1.28
PC3: NU1.29
PC4: NU1.44
PC5: NU1.45
PC6: NU1.96
PC7: NU1.97
PC8: NU1.98
PC9: NU1.99
PC10: NU1.111
PC11: NU1.112
PC12: NU1.113
PC13: NU1.7
PC14: NU1.8
PC15: NU1.9
PD2: NU1.116
PD3: NU1.117
PD4: NU1.118 U2.41 U4.34 U5.8 | length 6240.4
  Top Layer w8: NU1.118@3973,2513 3973,2427 4084,2316 ; 4083,2315 v1@6431,2315 ; v1@4204,2423 4208,2419 5400,2419 5508,2527 v1@5508,2658 ; v1@5390,2664 v1@5390,2787 ; v1@5511,2659 v1@5512.08,2660.08 ; v1@5513,2659 5608,2659 5676,2727 5805,2727 5823,2745 ; v1(5741,3304) U2.41@5741,3328 ; 5822,2746 U4.34@5876.03,2746 ; v1@6427,2593 6433,2599 U5.8@6433,2718
  Bottom Layer w8: v1@3976,2423 v1@4208,2423 ; v1@5392,2666 5503,2666 v1@5514,2655 ; v1@5397,2783 5665,2783 5780,2898 5780,3094 5736,3138 v1@5736,3306 ; v1@6433,2314 v1@6433,2591
  other v1: 6432,2318 3974,2423 4206,2423 6432,2593 5512,2658 5390,2666 5393,2786
PD5: NU1.119 U2.17 U4.13 U5.18 | length 7083.8
  Top Layer w8: 3992,2433 NU1.119@3992,2523 ; 3992,2435 4093,2334 6331,2334 6626,2629 ; v1@3992,2632 3995,2629 NU1.119@3995,2576 ; U4.13@5150,2945 v1@5178,2945 ; U2.17@5333,3783 5333,3919 5362,3948 5414,3948 5486,3876 6515,3876 v1@6533,3858 ; 6627,2628 U5.18@6627,2715 ; v1@6628,2788 6631,2785 U5.18@6631,2736
  Bottom Layer w8: v1@3989,2636 4098,2527 4785,2527 5176,2918 v1@5176,2945 ; v1(6535,3859) 6582,3859 6657,3784 6657,2817 v1@6626,2786
  other v1: 3990,2635 6628,2786 5177,2945
PD6: NU1.122 P5.1 R13.2 U4.17 | length 2361.9
  Top Layer w8: P5.1@3061,2698 3154,2605 3162,2613 3827,2613 3875,2661 v1@4056,2661 ; v1@4052,2659 4055,2656 NU1.122@4055,2565 ; v1@5040,2870 5044,2866 U4.17@5112,2866
  Bottom Layer w8: R13.2@4052,2661 4111,2602 4788,2602 ; 4788,2601 4792,2601 4893,2702 4893,2716 v1@5045,2868
  other v1: 4054,2660 5041.44,2868.56
PD7: NU1.123 U5.9 | length 2728
  Top Layer w8: NU1.123@4072,2516 4072,2424 4116,2380 6275,2380 6453,2558 U5.9@6453,2721
PE0: NU1.141 U2.39 | length 2204.1
  Top Layer w8: NU1.141@4425,2536 4425,2466 4455,2436 5365,2436 5440,2511 v1@5440,2823 ; 5678,3315 U2.39@5678,3328 ; v1@5679,3306 5679,3317
  Bottom Layer w8: v1@5438,2821 5629,2821 ; 5628,2822 5733,2927 5733,3061 5682,3112 v1@5682,3306
  other v1: 5438,2822 5681,3306
PE1: NU1.142 U2.40 | length 2149.6
  Top Layer w8: NU1.142@4447,2532 4447,2484 4472,2459 5343,2459 5416,2532 v1@5416,2802 ; v1@5711,3307 U2.40@5711,3334
  Bottom Layer w8: v1@5413.32,2805.32 5647.32,2805.32 ; 5645,2803 5755,2913 5755,3088 5713,3130 v1@5713,3301
  other v1: 5414,2803 5713,3306
PF6: NU1.18
PF10: NU1.22
PF11: NU1.49
PG6: NU1.91 P5.3 R12.1 | length 1190.6
  Top Layer w8: R12.1@2590,3025 2709,2906 P5.3@3048,2906 ; P5.3@3045,2908 3111,2974 NU1.91@3701,2974
PG7: NU1.92
PG8: NU1.93
PG9: NU1.124 R11.1 U4.32 | length 1987.5
  Top Layer w8: NU1.124@4093,2520 4093,2439 4127,2405 5434,2405 5628,2599 5628,2605 5731,2708 5825,2708 ; 5823,2708 5824,2709 U4.32@5854,2709
PG10: NU1.125 R9.1 U2.6 | length 1014
  Top Layer w8: NU1.125@4110,2565 4110,2608 v1@4169,2667 ; U2.6@5685,3782 5685,3827 5716,3858 6130,3858 6291,3697 ; 6292,3539 6292,3696
  other v1: 4172,2666
PG11: NU1.126
PG12: NU1.127
PG13: NU1.128
PG14: NU1.129
PG15: NU1.132
R1IN: P3.1 U1.13
T1OUT: P3.3 U1.14
"USB 5V": P20.1
VDD5: C2.1 C9.1 C11.1 J1.1 U1.16 U3.3
VDD33: C7.2 C10.1 C12.1 C14.2 C15.2 C16.2 C17.2 C18.2 C19.2 C20.2 C21.1 C22.1 C23.1 D1.1 D2.1 D3.1 L1.2 NU1.17 NU1.39 NU1.52 NU1.62 NU1.72 NU1.95 NU1.108 NU1.121 NU1.131 NU1.144 P7.1 P8.1 P8.2 R6.2 R8.1 R9.2 R10.2 R11.2 R12.2 R13.1 R14.1 R15.1 R16.2 R18.2 R19.2 R20.2 R21.2 U2.11 U2.33 U3.2 U4.29 U4.43 U5.12 U5.37 | length 1126
  Top Layer w8: U2.33@5492,3351 5492,3426 v1@5494,3428 ; U2.33@5493,3334 5493,3079 5649,2923 U4.43@5872,2923 ; U2.11@5522,3767 5523,3768 5523,3738
  Bottom Layer w8: v1@5495,3425 5495,3705 v1@5522,3732
  other v1: 5496,3426 5523,3732
pads on no net: NU1.6 NU1.85 NU1.86 NU1.106 P20.5 P20.6 REST1.3 REST1.4 U1.7 U1.8 U1.9 U1.10 U4.1 U4.27 U4.28 U4.30 U4.55 U4.56 U5.1 U5.2 U5.3 U5.4 U5.5 U5.6 U5.10 U5.11 U5.14 U5.15 U5.20 U5.21 U5.22 U5.23 U5.24 U5.25 U5.26 U5.27 U5.28 U5.33 U5.34 U5.35 U5.38 U5.39 U5.40 U5.45 U5.46 U5.47 U5.48

## Keep-outs
Keep-Out Layer:
  lines w10: 6655,1390 1560,1390 1560,4605 1560,4865 1575,4880 6655,4880 ; 7031,1378 7031,4868

## Text inside footprints (layer, text, board x,y; h text height)
P8: Top Overlay "20" at 3683,1759 h35 r180; Top Overlay "19" at 3683,1859 h35 r180; Top Overlay "1" at 4743,1859 h35 r180; Top Overlay "2" at 4743,1759 h35 r180